# Altium PCB smoker_ctrl.PcbDoc
Units mm, origin at the board's own origin, x right, y up, seen from the top; angles counter-clockwise.
Board outline 125 x 60 mm, 2 copper layers (Top Layer, Bottom Layer); 88 components, 48 nets, 257 pads, 508 vias.
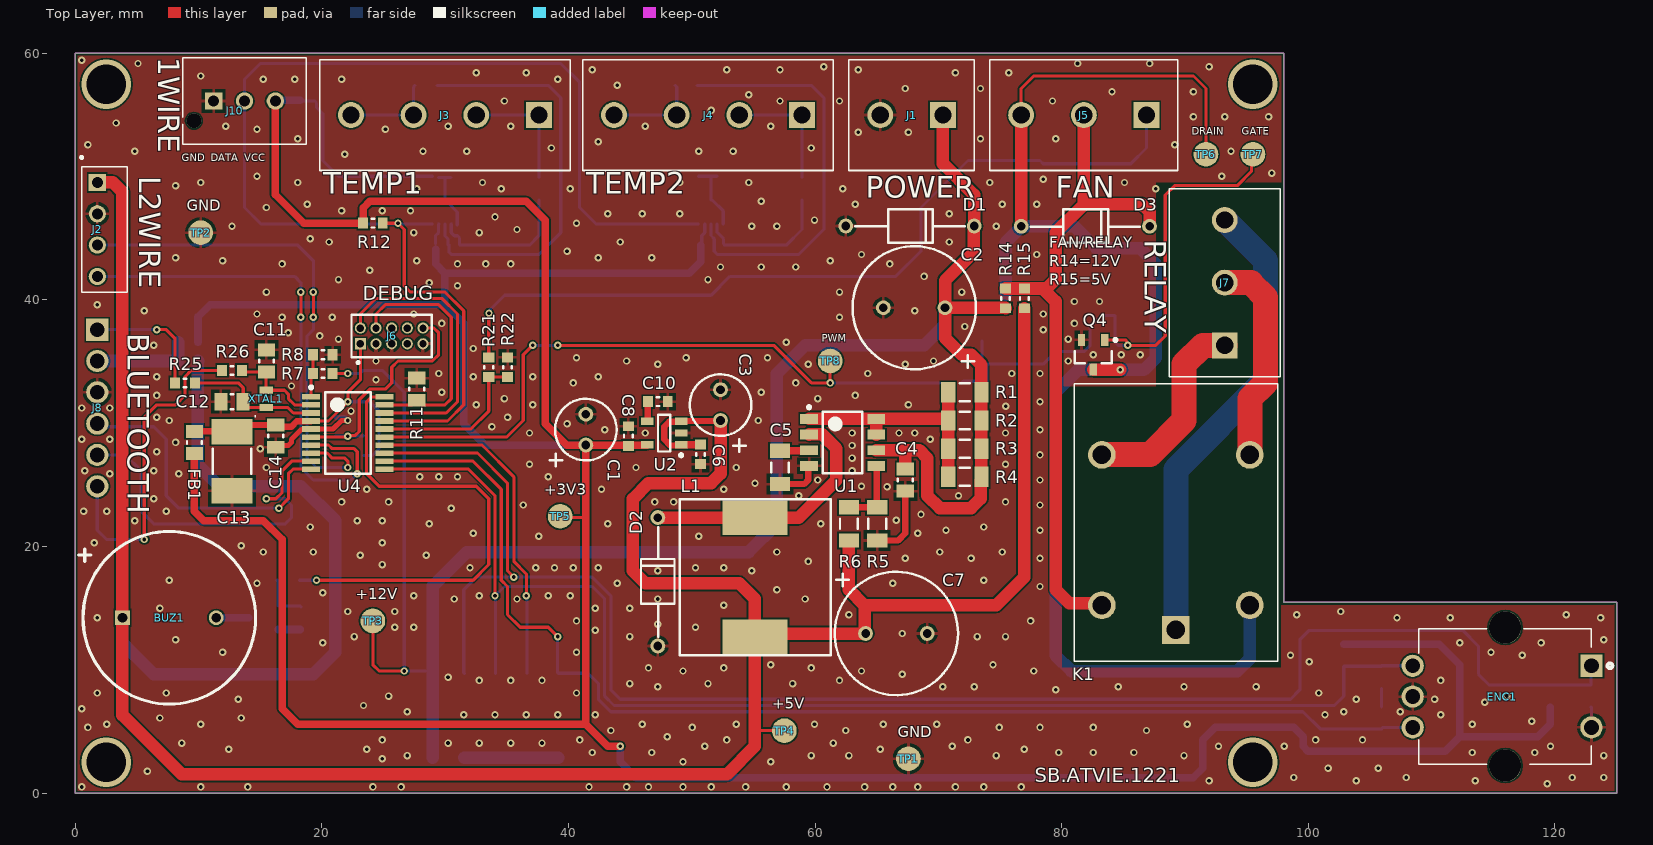
[diagram p0: Top Layer view]
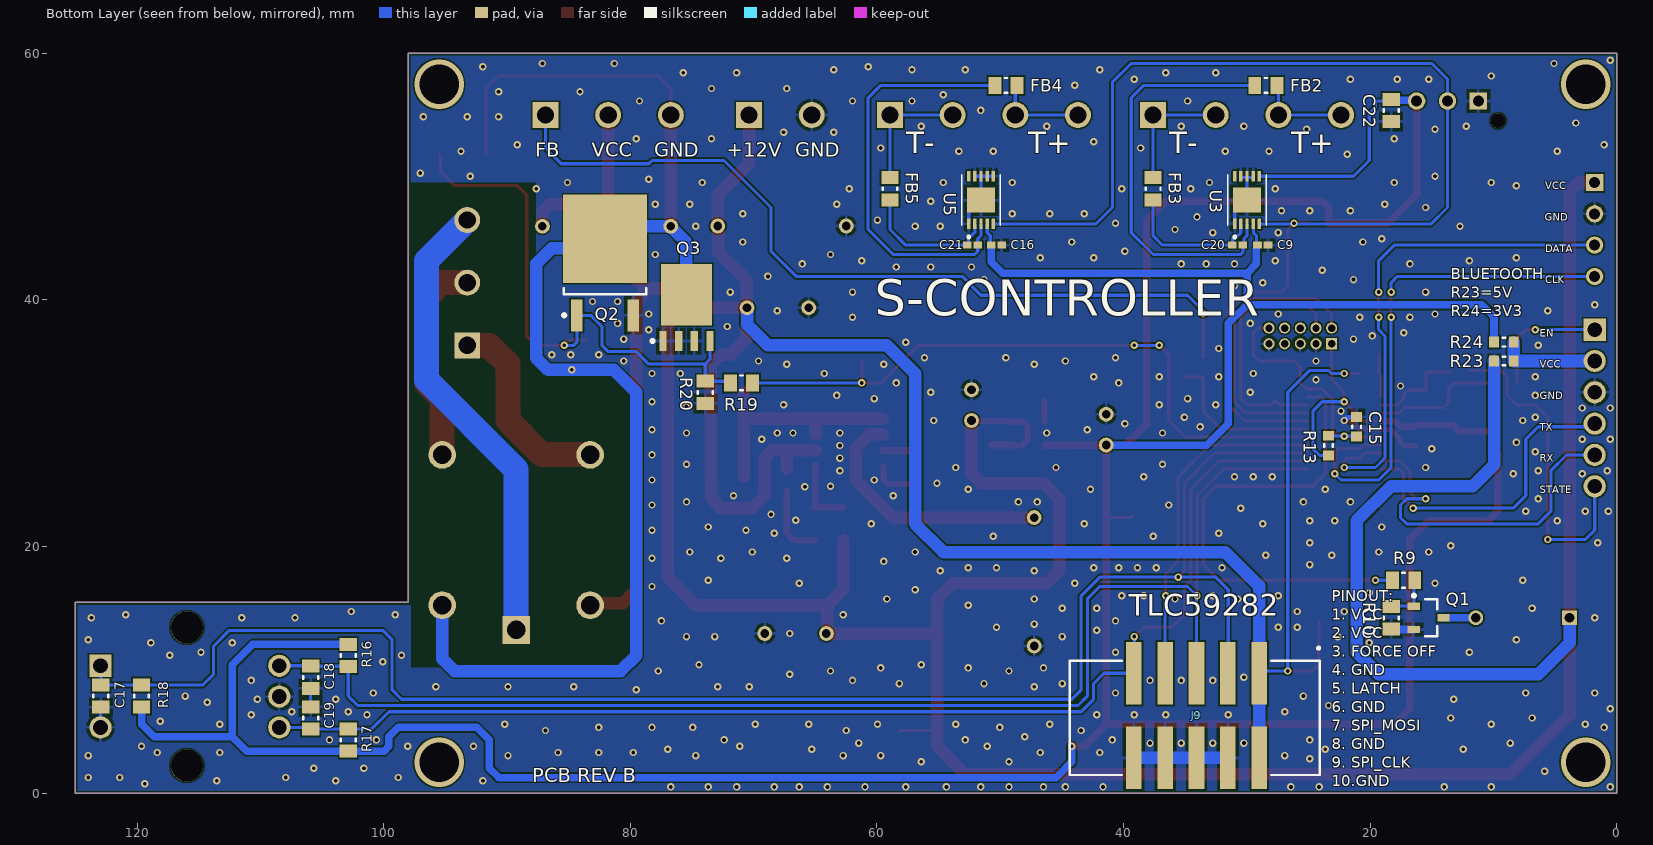
[diagram p1: Bottom Layer view, seen from below]

## Layer stack, top to bottom
Top Solder: solder mask 0.0102, Solder Resist, Dk 3.5
Top Layer: signal copper 0.0356
Dielectric 1: dielectric 0.32, FR-4, Dk 4.8
Bottom Layer: signal copper 0.0356
Bottom Solder: solder mask 0.0102, Solder Resist, Dk 3.5

## Board outline
0,0 125,0 125,15.5 98,15.5 98,60 0,60

## Design rules (kind name [scope] priority, off if disabled: settings)
Clearance [All] p1: gap=0.127 ignorepadtopadclearanceinfootprint=FALSE except(0: Arc-Hole Track-Hole SMDPad-Hole THPad-Hole Via-Hole Fill-Hole Poly-Hole Region-Hole Text-Hole)
HoleSize [All] p1: absolutevalues=TRUE maxlimit=6.3 minlimit=0.3 maxpercent=80.000 minpercent=20.000
MinimumSolderMaskSliver [All] p1: minsoldermaskwidth=0.001
PolygonConnect [All] p1: connectstyle=Relief reliefconductorwidth=0.254 reliefentries=4 polygonreliefangle="90 Angle" airgapwidth=0.254
RoutingVias [All] p1: holewidth=0.3 width=0.4 viastyle="Through Hole" minholewidth=0.3 minwidth=0.4 maxholewidth=6.3 maxwidth=7
SilkToSilkClearance [All] p1: silktosilkclearance=0.127
SilkToSolderMaskClearance [IsPad] p1: minsilkscreentomaskgap=0 clearancetoexposedcopper=TRUE
SolderMaskExpansion [All] p1: expansion=0.102 istentingtop=FALSE
Width [All] p1: maxlimit=20.32 minlimit=0.203 preferedwidth=0.254 minimp=50.000000 maximp=50.000000 favimp=50.000000
26 further rules are at their usual default settings.

## Components (designator, comment, footprint, x,y, rotation, side; value= is the part's Value field where it differs from the comment)
BUZ1 "CPM 121" "THT SND BUZ 14MM" 7.62,14.224 r0 top
C1 "22uF/35V" "THT CAP RAD D5.0mm P2.5mm" 41.402,28.234 r90 top
C2 "100uF/35V" "THT CAP RAD D10.0mm P5.0mm" 70.532,39.37 r180 top
C3 "22uF/35V" "THT CAP RAD D5.0mm P2.5mm" 52.324,30.226 r90 top
C4 "100nF/50V" "SMD 0805 GENERIC" 67.31,25.4 r90 top
C5 "470pF/50V" "SMD 1206 GENERIC" 57.15,26.416 r90 top
C6 "100nF" "SMD 0603 GENERIC" 50.696,27.484 r90 top
C7 "100uF/35V" "THT CAP RAD D10.0mm P5.0mm" 64.088,12.954 r0 top
C8 "100nF" "SMD 0603 GENERIC" 44.844,28.964 r270 top
C9 "100nF/16V" "SMD 0402 GENERIC" 28.702,44.45 r0 bottom
C10 "10nF" "SMD 0603 GENERIC" 47.244,31.75 r180 top
C11 "22pF/50V" "SMD 0805 GENERIC" 15.494,35.052 r270 top
C12 "22pF/50V" "SMD 0805 GENERIC" 12.7,31.75 r0 top
C13 "4,7uF/25V" "SMD 2312 POLARIZED" 12.7,26.924 r270 top
C14 "100nF/50V" "SMD 0805 GENERIC" 16.256,28.956 r270 top
C15 "100nF/16V" "SMD 0603 GENERIC" 21.082,29.718 r270 bottom
C16 "100nF/16V" "SMD 0402 GENERIC" 50.292,44.45 r0 bottom
C17 "100nF/50V" "SMD 0805 GENERIC" 122.936,7.874 r90 bottom
C18 "100nF/50V" "SMD 0805 GENERIC" 105.918,9.398 r90 bottom
C19 "100nF/50V" "SMD 0805 GENERIC" 105.918,6.096 r270 bottom
C20 "10nF/50V" "SMD 0402 GENERIC" 30.734,44.45 r0 bottom
C21 "10nF/50V" "SMD 0402 GENERIC" 52.241,44.45 r0 bottom
C22 "100nF/50V" "SMD 0805 GENERIC" 18.288,55.372 r270 bottom
D1 "1N4007" "THT DO-41" 62.484,46 r0 top
D2 "1N5819" "THT DO-41" 47.244,11.938 r90 top
D3 "1N4007" "THT DO-41" 76.708,45.974 r0 top
ENC1 "PEC12R-3222F-S0024" "THT REN PEC12R-3222F-S0024" 116.39,7.885 r0 top
FB1 "11R 100 MHz 1.5A" "SMD 0805 GENERIC" 9.652,28.448 r270 top
FB2 "11R 100 MHz 1.5A" "SMD 0805 GENERIC" 28.448,57.404 r0 bottom
FB3 "11R 100 MHz 1.5A" "SMD 0805 GENERIC" 37.592,49.022 r270 bottom
FB4 "11R 100 MHz 1.5A" "SMD 0805 GENERIC" 49.53,57.404 r0 bottom
FB5 "11R 100 MHz 1.5A" "SMD 0805 GENERIC" 58.928,49.022 r270 bottom
J1 "282841-2" "THT CON 2-PIN 5.08" 67.818,55 r180 top
J2 "LCD2WIRE" "THT CON 4-PIN 2.54 WHITE" 1.778,45.72 r270 top
J3 "282841-4" "THT CON 4-PIN 5.08" 29.972,55 r180 top
J4 "282841-4" "THT CON 4-PIN 5.08" 51.308,55 r180 top
J5 "282841-3" "THT CON 3-PIN 5.08" 81.788,55 r180 top
J6 "CON THT CORTEX DBG 10-PIN 2-ROW 1.27" "THT HEADER 2x5 1.27" 25.654,37.084 r0 top
J7 "282841-3" "THT CON 3-PIN 5.08" 93.218,41.402 r90 top
J8 "CON THT UNI 6-PIN 2.54" "THT CON UNI 6-PIN 2.54" 1.778,37.592 r270 top
J9 "CON SMD 10-PIN 2-ROW 2.54 WIDE" "SMD HEADER 2x5 2.54 WIDE" 36.615,6.301 r0 bottom
J10 "CON THT TE 1744418-3 3-PIN 2.5" "THT CON TE 1744418-3 2.5" 13.716,56.134 r0 top
K1 "REL 5V 10A 250VAC G5LE" "THT RELAY G5LE" 89.25,13.24 r90 top
L1 "220uH" "SMD IND SRR1210" 55.118,17.526 r270 top
Q1 "BC817" SOT23-3 15.24,14.224 r180 bottom
Q2 "IRLR2905" "SMD D-PAK (TO252AA)" 82.042,43.008 r90 bottom
Q3 "SQJA66EP" "SMD PowerPAK SO-8L" 75.438,39.37 r90 bottom
Q4 "BC817" SOT23-3 82.55,35.56 r270 top
R1 "1R" "SMD 1206 GENERIC" 72.136,32.512 r180 top
R2 "1R" "SMD 1206 GENERIC" 72.136,30.226 r180 top
R3 "1R" "SMD 1206 GENERIC" 72.136,27.94 r180 top
R4 "1R" "SMD 1206 GENERIC" 72.136,25.654 r180 top
R5 "1K2" "SMD 1206 GENERIC" 65.024,21.844 r90 top
R6 "3K6" "SMD 1206 GENERIC" 62.738,21.844 r90 top
R7 "5K" "SMD 0603 GENERIC" 20.066,34.036 r0 top
R8 "1K" "SMD 0603 GENERIC" 20.066,35.56 r180 top
R9 "2K2" "SMD 0805 GENERIC" 17.272,17.272 r180 bottom
R10 "10K" "SMD 0805 GENERIC" 18.288,14.224 r90 bottom
R11 "10K" "SMD 0805 GENERIC" 27.686,32.766 r90 top
R12 "4K7" "SMD 0603 GENERIC" 24.13,46.228 r0 top
R13 "10K" "SMD 0603 GENERIC" 23.368,28.194 r90 bottom
R14 "0R" "SMD 0603 GENERIC" 75.438,40.132 r270 top
R15 "0R" "SMD 0603 GENERIC" 76.962,40.132 r270 top
R16 "2K2" "SMD 0805 GENERIC" 102.87,11.176 r90 bottom
R17 "2K2" "SMD 0805 GENERIC" 102.87,4.318 r270 bottom
R18 "2K2" "SMD 0805 GENERIC" 119.634,7.874 r270 bottom
R19 "2K2" "SMD 0805 GENERIC" 70.982,33.274 r0 bottom
R20 "10K" "SMD 0805 GENERIC" 73.914,32.512 r90 bottom
R21 "5K" "SMD 0603 GENERIC" 33.528,34.544 r90 top
R22 "1K" "SMD 0603 GENERIC" 35.052,34.544 r270 top
R23 "0R" "SMD 0603 GENERIC" 9.144,35.052 r0 bottom
R24 "0R" "SMD 0603 GENERIC" 9.144,36.576 r0 bottom
R25 "0R" "SMD 0603 GENERIC" 8.89,33.274 r180 top
R26 "0R" "SMD 0603 GENERIC" 12.7,34.29 r180 top
TP1 "TPT SMD 200" "SMD TP 2.0mm" 67.564,2.794 r0 top
TP2 "TPT SMD 200" "SMD TP 2.0mm" 10.16,45.466 r0 top
TP3 "TPT SMD 200" "SMD TP 2.0mm" 24.13,13.97 r0 top
TP4 "TPT SMD 200" "SMD TP 2.0mm" 57.504,5.07 r0 top
TP5 "TPT SMD 200" "SMD TP 2.0mm" 39.314,22.457 r0 top
TP6 "TPT SMD 200" "SMD TP 2.0mm" 91.694,51.816 r0 top
TP7 "TPT SMD 200" "SMD TP 2.0mm" 95.504,51.816 r0 top
TP8 "TPT SMD 200" "SMD TP 2.0mm" 61.214,35.052 r0 top
U1 "PWR MC34063ADR" SOIC-8 62.23,28.448 r0 top
U2 "TPS79333DBVR" SOT23-5 47.752,29.21 r180 top
U3 "SNS TMP IF MAX31850KATB+T" TDFN-10 29.972,48.103 r90 bottom
U4 "MCU STM32G030F6P6" TSOP-20 22.098,29.21 r0 top
U5 "SNS TMP IF MAX31850KATB+T" TDFN-10 51.546,48.103 r90 bottom
XTAL1 "32.768 KHz" "SMD-2 XTAL 2.0mmx1.2mm" 15.494,32.004 r90 top

## Footprints (in the part's own frame and the unit in brackets; to place one, negate y for a bottom-side part, rotate by r counter-clockwise, add the part's x,y. Pads: shape width x height; smd on the part's side, far side on the other; paste and mask are expansions set on the pad)
"SMD 0402 GENERIC" [mm]
  rect 0.7x0.55 smd: 1(-0.425,0) 2(0.425,0)
  body extent -0.55,-0.27 0.55,0.28, height 0.35
"SMD 0603 GENERIC" [mm]
  rect 0.8x0.9 smd: 1(-0.8,0) 2(0.8,0)
  silkscreen extent -0.1,-0.35 0.1,0.35, body extent -0.85,-0.45 0.85,0.45, height 0.55
"SMD 0805 GENERIC" [mm]
  rect 1.05x1.4 smd: 1(-0.9,0) 2(0.9,0)
  silkscreen extent -0.1,-0.6 0.1,0.6, body extent -1.05,-0.7 1.05,0.7, height 0.6
"SMD 1206 GENERIC" [mm]
  rect 1.15x1.65 smd: 1(-1.35,0) 2(1.35,0)
  silkscreen extent -0.4,-0.72 0.4,0.72, body extent -1.58,-0.82 1.58,0.82, height 0.65
"SMD 2312 POLARIZED" [mm] "BAUFORM C"
  rect 2.05x3.35 smd: 1(-2.4,0) 2(2.4,0)
  silkscreen extent -3.69,-1.58 1,1.94, body extent -3.05,-1.65 3.05,1.65, height 2.6
"SMD D-PAK (TO252AA)" [mm] "D-PAK, 3-Pads, Body 6.21x6.73mm (max), IPC Medium Density"
  rect 2.6x0.95 smd: 1(-4.25,2.29) 3(-4.25,-2.29)
  rect 7.2x6.8 smd: 4(1.95,0)
  silkscreen extent -4.37,-3.35 -2.05,3.44, body extent -2.55,-3.37 3.67,3.37, height 2.39
"SMD HEADER 2x5 2.54 WIDE" [mil]
  rect 50x200 smd: 1(-300,-135) 2(-300,135) 3(-200,-135) 4(-200,135) 5(-100,-135) 6(-100,135) 7(0,-135) 8(0,135) 9(100,-135) 10(100,135)
  silkscreen extent -494,-219 305,190, body extent -500,-220 300,220, height 450
"SMD IND SRR1210" [mm]
  rect 2.8x5.3 smd: 1(-4.826,0) 2(4.826,0)
  silkscreen extent -6.32,-6.1 6.35,6.15, body extent -6,-6 6,6, height 10
"SMD PowerPAK SO-8L" [mm]
  rect 1.65x0.6 smd: 1(-2.7,-0.635) 1(-2.7,0.635) 1(-2.7,1.905) 4(-2.7,-1.905)
  rect 5x4.15 smd: 5(1.05,0)
  silkscreen extent -2.82,2.63 -2.58,2.88, body extent -1.9,-2.5 2.57,2.5, height 1.14
"SMD TP 2.0mm" [mm]
  round 2 smd: 1(0,0)
"SMD-2 XTAL 2.0mmx1.2mm" [mm]
  rect 0.6x1.1 smd: 1(-0.725,0.025) 2(0.675,0.025)
  body extent -1.03,-0.57 0.97,0.63, height 0.6
SOIC-8 [mm] "SOIC, 8-Leads, Body 4.90x3.90mm, Pitch 1.27mm, IPC Medium Density"
  rect 1.45x0.8 smd: 1(-2.725,1.905) 2(-2.725,0.635) 3(-2.725,-0.635) 4(-2.725,-1.905) 5(2.725,-1.905) 6(2.725,-0.635) 7(2.725,0.635) 8(2.725,1.905)
  silkscreen extent -2.85,-2.5 1.6,2.98, body extent -2,-2.5 2,2.5, height 1.75
SOT23-3 [mm]
  rect 1x0.6 smd: 1(-1.2,0.95) 2(-1.2,-0.95) 3(1.2,0)
  silkscreen extent -1.33,-1.5 0.7,1.92, body extent -1.15,-1.45 1.15,1.45, height 1.1
SOT23-5 [mm]
  rect 1x0.6 smd: 1(-1.375,0.95) 2(-1.375,0) 3(-1.375,-0.95) 4(1.375,-0.95) 5(1.375,0.95)
  silkscreen extent -1.5,-1.5 0.5,1.92, body extent -0.88,-1.5 0.87,1.5, height 1.45
TDFN-10 [mm]
  rrect25% 0.86x0.27 smd: 1(-1.935,1) 2(-1.935,0.5) 3(-1.935,0) 4(-1.935,-0.5) 5(-1.935,-1) 6(1.935,-1) 7(1.935,-0.5) 8(1.935,0) 9(1.935,0.5) 10(1.935,1)
  rect 2x2.3 smd paste-2: 11(0,0)
  silkscreen extent -3.09,-1.55 2.05,1.55, body extent -2,-1.5 2,1.5, height 0.8
"THT CAP RAD D5.0mm P2.5mm" [mm]
  round 1.2 hole 0.7: 1(0,0) 2(2.5,0)
  silkscreen extent -1.73,-2.5 3.75,2.95, body extent -1.27,-2.5 3.73,2.5, height 11
"THT CAP RAD D10.0mm P5.0mm" [mm]
  round 1.2 hole 0.7: 1(0,0) 2(5,0)
  silkscreen extent -2.5,-5 7.5,5, body extent -2.49,-5 7.51,5, height 12.5
"THT CON 2-PIN 5.08" [mm]
  rect 2.1x2.1 hole 1.4: 1(-2.54,0)
  round 2.1 hole 1.4: 2(2.54,0)
  silkscreen extent -5.08,-4.5 5.08,4.5, body extent -5.08,-4.43 5.58,4.57, height 15.2
"THT CON 3-PIN 5.08" [mm]
  rect 2.1x2.1 hole 1.4: 1(-5.08,0)
  round 2.1 hole 1.4: 2(0,0) 3(5.08,0)
  silkscreen extent -7.62,-4.5 7.62,4.5, body extent -7.62,-4.44 8.12,4.56, height 15.2
"THT CON 4-PIN 2.54 WHITE" [mm]
  rect 1.398x1.398 hole 0.89: 1(-3.81,0)
  round 1.398 hole 0.89: 2(-1.27,0) 3(1.27,0) 4(3.81,0)
  silkscreen extent -5.94,-1.37 5.08,2.42, body extent -5.08,-1.25 5.08,2.4, height 9.5
"THT CON 4-PIN 5.08" [mm]
  rect 2.1x2.1 hole 1.4: 1(-7.62,0)
  round 2.1 hole 1.4: 2(-2.54,0) 3(2.54,0) 4(7.62,0)
  silkscreen extent -10.16,-4.5 10.16,4.5, body extent -10.16,-4.43 10.66,4.57, height 15.2
"THT CON TE 1744418-3 2.5" [mm]
  rect 1.408x1.408 hole 0.9: 1(-2.5,0)
  round 1.408 hole 0.9: 2(0,0) 3(2.5,0)
  round 1.2 hole 1.2 unplated: ""(-4.1,-1.6)
  silkscreen extent -5,-3.5 5,3.5, body extent -5,-3.3 5,3.23, height 8.8
"THT CON UNI 6-PIN 2.54" [mm]
  rect 1.8x1.8 hole 1.2: 1(0,0)
  round 1.8 hole 1.2: 2(2.54,0) 3(5.08,0) 4(7.62,0) 5(10.16,0) 6(12.7,0)
"THT DO-41" [mm]
  round 1.2 hole 0.7: A(0,0) K(10.414,0)
  silkscreen extent 0.76,-1.35 9.63,1.37, body extent -0.38,-0.98 10.79,1.02, height 2.5
"THT HEADER 2x5 1.27" [mm]
  rect 0.9x0.9 hole 0.6: 1(-2.54,-0.635)
  round 0.9 hole 0.6: 2(-2.54,0.635) 3(-1.27,-0.635) 4(-1.27,0.635) 5(0,-0.635) 6(0,0.635) 7(1.27,-0.635) 8(1.27,0.635) 9(2.54,-0.635) 10(2.54,0.635)
  silkscreen extent -3.26,-2.26 3.26,1.72
"THT RELAY G5LE" [mm]
  rect 2.25x2.25 hole 1.5: 1(0,0)
  round 2.25 hole 1.5: 2(2,-6) 3(14.2,-6) 4(14.2,6) 5(2,6)
  silkscreen extent -2.55,-8.25 19.95,8.25, body extent -2.55,-8.25 19.95,8.25, height 19
"THT REN PEC12R-3222F-S0024" [mm]
  rect 1.8x1.8 hole 1.2: 1(6.568,2.449)
  round 1.8 hole 1.2: 2(6.568,-2.551) A(-7.932,2.449) B(-7.932,-2.551) C(-7.932,-0.051)
  round 2.6 hole 2.6 unplated: ""(-0.432,-5.651) ""(-0.432,5.549)
  silkscreen extent -7.43,-5.55 8.27,5.45, body extent -8.03,-7.05 6.72,6.95, height 20.25
"THT SND BUZ 14MM" [mm]
  rect 1.2x1.2 hole 0.8: 1(-3.8,0)
  round 1.2 hole 0.8: 2(3.8,0)
  silkscreen extent -7.37,-7 7,7, body extent -7,-7 7,7, height 7.93
TSOP-20 [mm] "TSOP, 20-Leads, Body 6.50x4.40mm, Pitch 0.65mm, IPC Medium Density"
  rect 1.45x0.45 smd: 1(-2.975,2.925) 2(-2.975,2.275) 3(-2.975,1.625) 4(-2.975,0.975) 5(-2.975,0.325) 6(-2.975,-0.325) 7(-2.975,-0.975) 8(-2.975,-1.625) 9(-2.975,-2.275) 10(-2.975,-2.925) 11(2.975,-2.925) 12(2.975,-2.275) 13(2.975,-1.625) 14(2.975,-0.975) 15(2.975,-0.325) 16(2.975,0.325) 17(2.975,0.975) 18(2.975,1.625) 19(2.975,2.275) 20(2.975,2.925)
  silkscreen extent -3.1,-3.3 1.85,3.82, body extent -2.25,-3.3 2.25,3.3, height 1.2

## Part data
BUZ1: library part "SND BUZ 3-15 VDC 14MM CPM 121"
C1 C3: library part "CAP THT ELC RAD 22uF 35V 20% D5.0mm P2.5mm"
C2 C7: library part "CAP THT ELC RAD 100uF 35V 20% D10.0mm P5.0mm"
C4 C14 C17 C18 C19 C22: library part "CAP SMD CER 100nF 50V 10% X7R 0805"
C5: library part "CAP SMD CER 470pF 50V 5% C0G 1206"
C6 C8 C15: library part "CAP SMD CER 100nF 16V 10% X7R 0603"
C9 C16: library part "CAP SMD CER 100nF 16V 10% X7R 0402"
C10: library part "CAP SMD CER 10nF 16V 10% X7R 0603"
C11 C12: library part "CAP SMD CER 22pF 50V 5% C0G 0805"
C13: library part "CAP SMD TAN 4,7uF 25V 10% 2312"
C20 C21: library part "CAP SMD CER 10nF 50V 10% X7R 0402"
D1 D3: library part "SEM GEN 1000V 1A DO-41 1N4007"
D2: library part "SEM SCH 40V 1A DO-41 1N5819"
ENC1: library part "REN 24PPR THT VER PEC12R-3222F-S0024"
FB1 FB2 FB3 FB4 FB5: library part "FBD SMD 11R 100MHz 1.5A 0805"
J1: library part "CON THT TERMINAL BLOCK  2-PIN 5.08"
J2: library part "CON THT LCD2WIRE 4-PIN 2.54"
J3 J4: library part "CON THT TERMINAL BLOCK  4-PIN 5.08"
J5 J7: library part "CON THT TERMINAL BLOCK  3-PIN 5.08"
J9: "HTST-105-01-SM-DV-P"
L1: library part "IND SMD 220uH 1.7A SRR1210"
Q1 Q4: library part "SEM BJT NPN 45V 500mA BC817"
Q2: library part "SEM FET NCH IRLR2905"
Q3: library part "SEM FET NCH SQJA66EP"
R1 R2 R3 R4: library part "RES SMD 1R 1% 1206"
R5: library part "RES SMD 1K2 1% 1206"
R6: library part "RES SMD 3K6 1% 1206"
R7 R21: library part "RES SMD 5K 1% 0603"
R8 R22: library part "RES SMD 1K 1% 0603"
R9 R16 R17 R18 R19: library part "RES SMD 2K2 1% 0805"
R10 R11 R20: library part "RES SMD 10K 1% 0805"
R12: library part "RES SMD 4K7 1% 0603"
R13: library part "RES SMD 10K 1% 0603"
R14 R15 R23 R24 R25 R26: library part "RES SMD 0R 0603"
U2: library part "PWR TPS79333DBVR"
XTAL1: library part "XTAL SMD 32.768 KHz 2.0mmx1.2mm"

## Via types
v1: diameter 0.6, hole 0.3, Top Layer to Bottom Layer, tented both sides, 502 vias
v2: diameter 4, hole 3.2, Top Layer to Bottom Layer, 4 vias
v3: diameter 0.6, hole 0.3, Top Layer to Bottom Layer, 2 vias

## Nets (pads, with @x,y where several pads share a name; then routed paths per layer and width w, separated by ;. In a path a pad name is that pad's centre, name@x,y a point inside that pad or via, vN(x,y) a via of type N, cw(c..) or ccw(c..) an arc to the next point about the centre after c; other vN are vias at no path point)
3V3: C1.1 C8.2 C9.2 C16.2 C22.1 FB1.2 J10.3 R12.1 R16.2 R17.2 R18.2 R24.2 TP5.1 U2.5 U3.4 U3.6 U5.4 | length 329.6
  Top Layer w0.254: TP5.1 39.418,22.352 41.148,22.352
  Top Layer w0.508: C8.2@44.704,28.156 44.747,28.199 C8.2@44.762,28.214 ; U2.5@46.331,28.214 U2.5
  Top Layer w0.61: FB1.2 9.652,22.86 10.414,22.098 15.24,22.098 16.764,20.574 16.764,6.858 18.034,5.588 41.402,5.588 ; J10.3 16.216,48.554 18.542,46.228 R12.1 23.33,47.46 23.876,48.006 36.576,48.006 38.1,46.482 38.1,29.972 39.838,28.234 C1.1 ; v1(44.196,3.81) 43.18,3.81 41.402,5.588 ; C8.2@44.762,28.214 U2.5@46.331,28.214 ; C8.2 44.81,28.199 44.747,28.199 41.437,28.199 C1.1 ; 41.402,5.588 C1.1
  Bottom Layer w0.254: C22.1@18.219,56.203 18.288,56.134 19.409,56.134 19.558,55.985 19.558,55.626 20.066,55.118 20.066,51.308 21.336,50.038 U3.6 ; C9.2@29.21,44.533 29.21,45.212 29.464,45.466 29.464,46.16 U3.4 ; C16.2@50.8,44.533 50.8,45.212 51.046,45.458 U5.4
  Bottom Layer w0.61: R24.2 9.944,38.646 10.922,39.624 29.972,39.624 ; J10.3 16.285,56.203 C22.1@18.219,56.203 ; 29.21,44.131 29.21,42.926 29.972,42.164 ; C1.1 33.234,28.234 31.496,29.972 31.496,38.1 29.972,39.624 ; v1(44.196,3.81) 44.196,2.54 45.466,1.27 90.678,1.27 91.44,2.032 91.44,4.318 92.456,5.334 98.806,5.334 99.568,4.572 99.568,3.81 99.96,3.418 R17.2 111.114,3.418 112.268,4.572 ; C16.2 50.717,43.097 49.784,42.164 29.972,42.164 ; R16.2 110.606,12.076 112.268,10.414 112.268,4.572 ; R18.2 119.634,5.588 118.618,4.572 112.268,4.572 ; 29.972,39.624 29.972,42.164
3V3_FILT: C13.1 C14.1 FB1.1 J6.1 R13.1 U4.4 | length 26.5
  Top Layer w0.254: U4.4 20.533,30.185 v1(22.098,31.75) 22.098,32.512 23.114,33.528 J6.1 J6.1@22.86,36.195
  Top Layer w0.508: FB1.1 12.676,29.348 C13.1 13.232,29.856 C14.1 16.394,29.718 17.526,29.718 17.964,30.156 19.094,30.156 U4.4
  Bottom Layer w0.254: v1(22.098,31.75) 23.876,31.75 24.638,30.988 24.638,27.94 24.092,27.394 R13.1
5V: BUZ1.1 C3.1 C6.2 C7.1 J2.1 L1.2 R6.1 R15.2 R23.2 TP4.1 U2.1 U2.3 | length 258.3
  Top Layer w0.254: 55.118,5.08 TP4.1@58.166,5.08
  Top Layer w0.508: U2.1@49.139,28.272 U2.1 49.081,28.214 48.701,28.214 48.681,28.194 48.26,28.194 47.752,28.702 47.752,29.718 48.148,30.114 49.081,30.114 U2.3 49.16,30.193 52.291,30.193 C3.1 ; C6.2@50.684,28.272 C6.2 ; C7.1@64.008,13.034 C7.1
  Top Layer w0.61: U2.1@49.139,28.272 C6.2@50.684,28.272
  Top Layer w1.016: J2.1@1.969,49.339 J2.1 3.048,49.53 3.82,48.758 BUZ1.1 3.82,6.34 8.636,1.524 52.832,1.524 55.118,3.81 55.118,5.08 L1.2 ; C3.1 52.324,25.908 51.562,25.146 46.482,25.146 45.212,23.876 45.212,18.034 46.228,17.018 53.848,17.018 55.118,15.748 L1.2 ; R6.1 62.738,16.51 64.008,15.24 ; C7.1@64.008,13.034 64.008,15.24 ; C7.1 64.053,12.919 55.337,12.919 L1.2 ; R15.2 76.962,17.526 74.676,15.24 64.008,15.24
  Bottom Layer w1.016: BUZ1.1 3.82,12.182 6.35,9.652 19.304,9.652 21.082,11.43 21.082,22.098 18.288,24.892 11.684,24.892 9.906,26.67 9.906,35.014 R23.2
12V: C2.1 C4.2 D1.K J1.1 J9.1 J9.2 R1.1 R2.1 R3.1 R4.1 R7.2 R14.2 TP3.1 U1.6 | length 164.5
  Top Layer w0.254: R7.2 v1(22.098,34.036) ; TP3.1 24.13,10.414 24.638,9.906 v1(26.67,9.906)
  Top Layer w1.016: U1.6 67.31,27.813 ; C4.2 67.31,27.813 ; J1.1 70.358,51.054 72.898,48.514 D1.K 72.863,45.965 72.863,43.907 70.532,41.576 C2.1 ; R14.2 75.4,39.37 C2.1 ; 67.31,27.813 68.453,27.813 69.088,27.178 69.088,24.13 70.104,23.114 72.644,23.114 73.419,23.889 73.419,25.337 73.482,25.4 73.486,25.4 R4.1 R3.1 R2.1 R1.1 73.486,34.718 72.644,35.56 71.882,35.56 70.532,36.91 C2.1
  Bottom Layer w0.254: v1(22.098,34.036) 23.114,34.036 23.368,34.29 24.892,34.29 26.67,32.512 v1(26.67,9.906) 28.819,9.906 J9.1
  Bottom Layer w1.016: J9.2 J9.1 28.995,16.803 31.75,19.558 54.61,19.558 56.896,21.844 56.896,34.036 59.182,36.322 68.834,36.322 70.497,37.985 70.497,39.335 C2.1
BUZZER: R9.1 U4.20 | length 39.4
  Top Layer w0.254: v1(19.558,17.272) 32.258,17.272 33.528,18.542 33.528,23.876 32.512,24.892 24.638,24.892 23.622,25.908 23.622,31.75 24.007,32.135 U4.20
  Bottom Layer w0.254: R9.1 v1(19.558,17.272)
ENC_A: C18.2 ENC1.A J9.5 R16.1 U4.11 | length 110.4
  Top Layer w0.254: U4.11 31.881,26.285 34.036,24.13 v1(34.036,16.002)
  Bottom Layer w0.254: J9.5 34.075,15.963 v1(34.036,16.002) 34.798,16.764 41.91,16.764 42.926,15.748 42.926,7.874 43.688,7.112 102.108,7.112 102.87,7.874 R16.1 102.892,10.298 C18.2 105.954,10.334 ENC1.A
ENC_B: C19.2 ENC1.B J9.9 R17.1 U4.12 | length 100.6
  Top Layer w0.254: U4.12 32.247,26.935 34.544,24.638 34.544,17.272 35.052,16.764 35.052,14.478 36.068,13.462 38.354,13.462 v1(39.116,12.7)
  Bottom Layer w0.254: v1(39.116,12.7) 39.116,9.769 J9.9 41.578,9.73 42.418,8.89 42.418,7.62 43.434,6.604 99.568,6.604 100.954,5.218 R17.1 105.896,5.218 C19.2 106.056,5.334 ENC1.B
ENC_SW: C17.2 ENC1.1 J9.3 R18.1 U4.13 | length 135.5
  Top Layer w0.254: U4.13 32.613,27.585 35.052,25.146 35.052,18.034 v1(35.56,17.526)
  Bottom Layer w0.254: J9.3 31.496,9.769 31.496,16.51 32.512,17.526 v1(35.56,17.526) 41.91,17.526 43.434,16.002 43.434,8.382 44.196,7.62 98.552,7.62 99.314,8.382 99.314,12.446 100.076,13.208 112.522,13.208 113.792,11.938 113.792,9.652 114.67,8.774 R18.1 C17.2 122.936,10.312 ENC1.1
FAN_FB: R21.1 R22.2 U4.16 | length 13.3
  Top Layer w0.254: U4.16 32.075,29.535 33.528,30.988 R21.1 R22.2
GND: C1.2 C2.2 C3.2 C4.1 C5.1 C6.1 C7.2 C8.1 C9.1 C10.1 C11.1 C12.1 C13.2 C14.2 C15.1 C16.1 C17.1 C18.1 C19.1 C22.2 D1.A D2.A ENC1.2 ENC1.C J1.2 J2.2 J6.3 J6.5 J6.9 J8.3 J9.4 J9.6 J9.8 J9.10 J10.1 Q1.2 Q2.3 Q3.1 Q4.2 R5.1 R8.1 R10.1 R11.2 R20.1 R22.1 TP1.1 TP2.1 U1.4 U2.2 U3.1 U3.7 U3.8 U3.9 U3.11 U4.5 U5.1 U5.6 U5.7 U5.8 U5.9 U5.11 | length 41.4
  Top Layer w0.4: C14.2 16.394,28.194 17.272,28.194 17.526,28.448 17.526,28.702 18.334,29.51 19.098,29.51 U4.5 20.899,29.535 21.59,30.226 v1(22.098,30.226)
  Top Layer w0.508: C5.1 59.102,25.066 59.436,25.4 59.436,26.474 U1.4 ; R5.1 66.722,20.494 67.31,21.082 C4.1
  Bottom Layer w0.254: R10.1@18.238,13.274 R10.1 ; U3.7@29.472,49.941 U3.8@29.972,49.941 ; U3.9@30.472,49.941 U3.8@29.972,49.941 ; U3.1@30.972,46.071 30.972,47.133 30.099,48.006 29.972,48.006 U3.8@29.972,49.941 ; U5.6 U5.7 U5.8 ; U5.9 U5.8 ; U5.1 52.546,47.23 51.673,48.103 U5.11 U5.8 ; C19.1 C18.1 ; C17.1 122.958,6.952 ENC1.2
  Bottom Layer w0.4: C15.1 21.12,30.48 21.844,30.48 v1(22.098,30.226)
  Bottom Layer w0.61: Q1.2 R10.1@18.238,13.274
  Bottom Layer w1.016: J9.4 J9.6 J9.8 J9.10
  other v1: 0.508,0.508 10.16,0.508 13.97,0.508 24.13,0.508 26.416,0.508 41.656,0.508 44.704,0.508 46.482,0.508 49.276,0.508 51.562,0.508 54.356,0.508 57.658,0.508 60.96,0.508 64.008,0.508 66.294,0.508 68.326,0.508 71.374,0.508 73.66,0.508 76.708,0.508 119.38,0.762 91.948,1.016 103.886,1.016 113.538,1.016 98.806,1.27 107.95,1.27 121.412,1.27 123.952,1.27 5.842,1.778 101.6,2.032 105.664,2.032 49.276,2.54 56.388,2.54 24.892,2.794 26.924,3.048 59.69,3.048 62.738,3.048 74.676,3.048 89.916,3.048 123.952,3.048 41.91,3.302 46.736,3.302 79.756,3.302 82.55,3.302 85.852,3.302 113.284,3.302 118.364,3.302 12.446,3.556 23.622,3.556 65.278,3.556 76.962,3.556 51.054,3.81 71.12,3.81 92.71,3.81 98.044,3.81 119.634,3.81 8.636,4.064 30.226,4.064 32.766,4.064 35.306,4.064 37.846,4.064 61.468,4.064 24.892,4.318 40.894,4.318 52.832,4.318 72.39,4.318 100.584,4.318 104.394,4.318 48.006,4.572 43.434,5.08 62.484,5.08 86.868,5.08 1.016,5.334 50.038,5.334 74.93,5.334 78.232,5.334 82.55,5.334 2.54,5.588 10.16,5.588 45.974,5.588 53.594,5.588 59.944,5.588 65.532,5.588 69.85,5.588 90.17,5.588 113.284,5.588 118.11,5.842 6.858,6.096 13.462,6.096 31.496,6.35 34.036,6.35 36.576,6.35 39.116,6.35 42.164,6.35 101.346,6.35 110.744,6.35 26.924,6.604 102.87,6.604 107.442,6.604 0.508,6.858 23.368,7.112 114.3,7.366 13.208,7.62 103.886,7.62 110.236,7.62 25.4,7.874 116.078,7.874 1.778,8.128 7.366,8.128 40.64,8.128 100.838,8.128 79.502,8.382 47.244,8.636 70.358,8.636 72.898,8.636 84.582,8.636 89.916,8.636 95.758,8.636 44.958,8.89 51.308,8.89 58.166,8.89 32.766,9.144 35.306,9.144 37.846,9.144 61.976,9.144 110.744,9.144 30.226,9.398 67.056,9.652 49.276,9.906 63.754,9.906 77.724,9.906 46.482,10.16 52.578,10.16 59.69,10.16 56.388,10.414 74.422,10.414 100.076,10.668 98.552,11.176 117.348,11.176 11.938,11.43 40.64,11.43 114.808,11.43 20.066,12.192 112.268,12.192 118.872,12.192 8.128,12.446 123.952,12.446 22.606,12.7 44.958,12.7 73.152,12.7 75.438,12.7 67.056,12.954 42.164,13.208 25.908,13.462 27.432,13.462 50.292,13.462 47.244,13.716 40.64,13.97 77.47,13.97 1.778,14.224 107.188,14.224 111.506,14.224 123.698,14.224 62.738,14.478 99.06,14.478 120.904,14.478 22.098,14.732 25.908,14.732 102.616,14.732 6.858,14.986 42.164,14.986 44.958,14.986 52.578,15.24 30.734,15.748 35.814,15.748 47.244,15.748 59.182,15.748 27.432,16.002 32.766,16.002 38.354,16.002 40.132,16.002 20.066,16.256 56.896,16.51 78.232,16.764 14.732,17.018 43.942,17.018 66.294,17.018 7.62,17.272 73.66,17.272 47.244,18.034 54.864,18.034 32.004,18.288 37.338,18.288 38.862,18.288 40.386,18.288 42.418,18.288 50.292,18.288 52.578,18.288 24.892,18.542 59.436,18.796 67.31,19.05 72.644,19.05 78.232,19.05 23.114,19.304 28.448,19.304 15.24,19.558 19.304,19.558 56.896,19.558 70.104,19.558 75.184,19.558 13.462,20.066 1.524,20.32 24.892,20.32 37.592,20.828 50.546,20.828 32.258,21.082 68.326,21.082 70.612,21.336 78.232,21.336 19.05,21.59 73.66,21.59 28.702,21.844 43.18,21.844 60.452,21.844 4.826,22.098 22.86,22.098 24.892,22.098 66.565,22.144 68.58,22.606 0.664,22.866 2.54,22.86 7.366,22.86 30.48,23.114 36.322,23.368 78.232,23.368 21.59,23.622 25.4,23.622 46.99,23.622 48.514,23.622 75.438,23.622 6.35,23.876 58.674,24.13 71.628,24.13 23.622,24.638 42.672,24.638 52.578,24.638 65.833,24.845 63.754,24.892 55.118,25.146 60.198,25.4 78.232,25.4 27.94,25.654 29.464,25.654 30.988,25.654 38.354,25.654 2.794,25.908 8.382,25.908 0.762,26.162 6.35,26.162 62.992,26.162 15.494,26.416 45.466,26.416 53.594,26.416 36.83,26.67 75.438,26.67 62.992,27.178 78.232,27.432 6.604,27.686 14.986,27.94 62.992,28.194 8.128,28.448 0.508,28.702 2.794,28.702 69.342,28.702 36.83,29.21 46.228,29.21 62.992,29.21 66.802,29.21 68.072,29.21 75.438,29.21 42.926,29.464 78.232,29.464 33.782,29.718 39.878,29.972 7.62,30.226 55.372,30.226 6.604,30.48 35.052,30.48 22.352,30.988 0.508,31.242 2.794,31.242 75.45,31.392 32.512,31.496 37.084,31.496 67.564,31.496 78.232,31.75 34.798,32.004 60.198,32.004 6.604,32.258 63.246,32.258 29.718,32.512 55.626,32.512 17.526,33.02 40.386,33.274 58.42,33.274 24.384,33.528 6.604,33.782 32.258,33.782 37.084,33.782 42.418,33.782 29.464,34.036 64.262,34.036 75.946,34.036 78.232,34.036 47.244,34.798 59.436,34.798 67.31,34.798 24.384,35.052 44.704,35.052 69.596,35.052 80.518,35.052 40.64,35.306 49.53,35.306 56.134,35.306 82.55,35.56 84.836,35.56 86.36,35.56 32.258,36.068 6.35,36.322 57.658,36.576 21.336,36.83 80.518,36.83 19.812,37.084 17.272,37.338 78.486,37.592 72.136,37.846 29.718,38.1 81.026,38.1 16.764,38.608 20.828,38.608 61.976,38.608 14.732,38.862 27.432,38.862 78.486,38.862 5.588,39.116 68.072,39.116 1.778,39.624 81.026,39.878 83.058,39.878 15.494,40.64 61.976,40.64 71.882,40.64 30.988,41.148 28.702,41.402 21.336,41.656 51.308,41.656 68.834,41.91 23.876,42.418 52.324,42.672 55.626,42.672 58.42,42.672 16.764,42.926 30.988,42.926 33.274,42.926 35.306,42.926 66.04,42.926 11.938,43.18 27.686,43.18 61.214,43.18 8.128,43.434 42.418,43.434 46.736,43.434 63.754,43.688 77.978,43.688 39.878,43.942 20.574,44.704 44.196,44.704 70.866,44.704 19.05,44.958 27.432,45.466 32.766,45.466 35.814,45.72 12.7,45.974 54.864,45.974 56.896,45.974 74.676,45.974 40.64,46.228 59.944,46.482 34.036,46.736 43.18,46.99 45.974,46.99 49.022,46.99 70.866,46.99 21.59,47.244 24.892,47.244 27.178,47.244 15.494,47.498 18.796,47.752 63.246,47.752 75.184,47.752 77.978,47.752 55.626,48.006 27.686,49.022 34.544,49.022 40.132,49.022 62.23,49.022 87.63,49.022 8.128,49.276 10.16,49.53 18.034,49.53 33.02,49.53 49.022,49.53 54.61,49.53 74.168,49.53 85.09,49.53 78.486,49.784 14.732,50.038 92.964,50.038 97.028,50.292 21.844,51.816 4.826,52.07 28.194,52.07 31.75,52.07 50.546,52.07 53.34,52.07 93.726,52.07 38.608,52.324 59.69,52.324 1.016,52.578 89.154,52.578 42.418,52.832 18.034,53.086 73.406,53.086 79.502,53.086 63.5,53.594 67.564,53.594 14.732,53.848 25.146,53.848 12.192,54.102 30.226,54.102 35.306,54.102 46.228,54.102 56.388,54.102 3.302,54.356 90.678,54.864 93.218,54.864 96.774,54.864 51.562,55.372 34.798,56.134 57.15,56.134 61.976,56.134 79.248,56.134 54.61,56.642 84.074,56.896 90.678,56.896 67.31,57.15 73.406,57.15 43.942,57.404 15.24,57.912 17.78,57.912 21.59,57.912 39.116,57.912 10.16,58.166 32.512,58.42 36.576,58.42 71.374,58.42 75.692,58.42 41.91,58.674 52.832,58.674 57.15,58.674 63.5,58.674 60.706,58.928 91.948,58.928 5.08,59.182 81.28,59.182 87.122,59.182 0.508,59.436
L2W_CLK: J2.4 U4.7 | length 42.7
  Top Layer w0.254: v1(18.288,38.608) v1(18.288,40.64) ; U4.7 20.533,28.235 20.828,27.94 22.606,27.94 22.86,27.686 v1(22.86,25.908)
  Bottom Layer w0.254: J2.4 17.78,41.91 18.288,41.402 v1(18.288,40.64) ; v1(18.288,38.608) 18.288,26.416 19.304,25.4 22.352,25.4 v1(22.86,25.908)
L2W_DATA: J2.3 U4.8 | length 41.6
  Top Layer w0.254: U4.8 20.421,27.585 20.828,27.178 21.844,27.178 22.098,26.924 v1(22.098,26.416) ; v1(19.304,38.608) v1(19.304,40.64)
  Bottom Layer w0.254: J2.3 18.034,44.45 19.304,43.18 v1(19.304,40.64) ; v1(19.304,38.608) 19.304,37.592 18.796,37.084 18.796,27.178 19.558,26.416 v1(22.098,26.416)
NetBUZ1_2: BUZ1.2 Q1.3 | length 2.6
  Bottom Layer w0.61: BUZ1.2 Q1.3
NetC5_2: C5.2 U1.3 | length 2.4
  Top Layer w0.61: C5.2 57.174,27.789 59.481,27.789 U1.3
NetC10_2: C10.2 U2.4 | length 1.6
  Top Layer w0.508: U2.4 46.411,30.193 46.411,31.716 C10.2
NetC20_1: C20.1 FB2.2 U3.3 | length 33.7
  Bottom Layer w0.254: FB2.2 38.354,57.404 39.37,56.388 39.37,45.466 37.592,43.688 30.48,43.688 30.309,43.859 C20.1 C20.1@30.304,44.455 ; U3.3 29.972,45.212 30.226,44.958 30.226,44.466 C20.1@30.242,44.45
NetC20_2: C20.2 FB3.2 U3.2 | length 11.8
  Bottom Layer w0.254: U3.2 30.48,46.16 30.48,45.466 30.734,45.212 30.988,45.212 31.159,45.041 C20.2 36.83,44.45 37.592,45.212 FB3.2
NetC21_1: C21.1 FB4.2 U5.3 | length 33.5
  Bottom Layer w0.254: FB4.2 59.69,57.404 60.706,56.388 60.706,45.72 58.674,43.688 52.07,43.688 51.816,43.942 C21.1 51.816,44.958 51.546,45.228 U5.3
NetC21_2: C21.2 FB5.2 U5.2 | length 11.2
  Bottom Layer w0.254: U5.2 52.046,45.49 52.578,44.958 52.578,44.538 C21.2 57.658,44.45 58.928,45.72 FB5.2
NetD2_K: D2.K L1.1 U1.2 | length 21
  Top Layer w1.016: D2.K L1.1 58.674,22.352 61.722,25.4 61.722,27.94 61.15,28.512 61.15,28.517 60.555,29.113 59.535,29.113 U1.2
NetD3_A: D3.A J5.3 K1.2 Q2.4 Q3.5 Q4.3 TP6.1 | length 112
  Top Layer w0.254: J5.3 76.708,57.15 77.724,58.166 90.678,58.166 91.694,57.15 TP6.1
  Top Layer w1.016: D3.A J5.3 ; Q4.3 84.712,34.36 v1(84.732,34.34)
  Bottom Layer w1.016: Q3.5 75.438,44.654 76.708,45.924 D3.A 81.026,45.974 Q2.4 82.804,44.196 86.36,44.196 87.63,42.926 87.63,35.306 86.664,34.34 v1(84.732,34.34) 81.33,34.34 79.502,32.512 79.502,11.176 80.772,9.906 94.234,9.906 95.25,10.922 K1.2
NetD3_K: D3.K J5.2 K1.5 R14.1 R15.1 | length 54.5
  Top Layer w1.016: R14.1 R15.1 78.448,40.932 ; J5.2 81.788,47.752 ; K1.5 83.079,15.411 80.601,15.411 79.502,16.51 79.502,39.878 78.448,40.932 ; D3.K 87.12,45.976 87.12,47.157 86.525,47.752 81.788,47.752 ; 78.448,40.932 78.778,40.932 79.502,41.656 79.502,45.466 81.788,47.752
NetFB2_1: FB2.1 J3.3 J3.4 | length 7.5
  Bottom Layer w0.254: J3.4 J3.3 27.432,57.288 FB2.1
NetFB3_1: FB3.1 J3.1 J3.2 | length 10.2
  Bottom Layer w0.254: J3.2 J3.1 FB3.1
NetFB4_1: FB4.1 J4.3 J4.4 | length 7.5
  Bottom Layer w0.254: J4.4 J4.3 48.768,57.266 FB4.1
NetFB5_1: FB5.1 J4.1 J4.2 | length 10.2
  Bottom Layer w0.254: J4.2 J4.1 FB5.1
NetJ5_1: J5.1 R21.2 | length 67.6
  Top Layer w0.254: R21.2 33.528,38.896 v1(33.547,38.915)
  Bottom Layer w0.254: v1(33.547,38.915) 33.542,38.92 33.542,39.13 34.798,40.386 51.562,40.386 53.086,41.91 66.548,41.91 68.58,43.942 68.58,47.498 72.39,51.308 78.232,51.308 78.486,51.054 85.598,51.054 86.868,52.324 J5.1
NetJ7_1: J7.1 K1.4 | length 16.3
  Top Layer w2.032: K1.4 83.292,27.482 87.172,27.482 89.916,30.226 89.916,34.798 91.44,36.322 J7.1
NetJ7_2: J7.2 K1.3 | length 17.1
  Top Layer w2.032: J7.2 95.33,41.402 96.52,40.212 96.52,33.274 95.25,32.004 K1.3
NetJ7_3: J7.3 K1.1 | length 37.6
  Bottom Layer w2.032: K1.1 89.25,26.258 96.52,33.528 96.52,43.18 J7.3
NetJ8_1: J8.1 R25.2 | length 10.2
  Top Layer w0.254: v3(6.604,37.592) 7.366,37.592 8.09,36.868 R25.2
  Bottom Layer w0.254: J8.1 v3(6.604,37.592)
NetJ8_2: J8.2 R23.1 R24.1 | length 8.1
  Bottom Layer w1.016: J8.2 R23.1 R24.1
NetJ8_6: J8.6 R26.2 | length 26.4
  Top Layer w0.254: v3(5.588,20.574) 5.588,30.48 6.604,31.496 8.128,31.496 8.89,32.258 8.89,33.782 9.398,34.29 R26.2
  Bottom Layer w0.254: J8.6 1.778,21.336 2.54,20.574 v3(5.588,20.574)
NetJ9_7: J9.7 U4.14 | length 27.9
  Top Layer w0.254: U4.14 32.979,28.235 35.56,25.654 35.56,18.796 36.576,17.78 v1(36.576,16.002)
  Bottom Layer w0.254: v1(36.576,16.002) 36.576,15.748 36.615,15.709 J9.7
NetQ1_1: Q1.1 R9.2 R10.2 | length 4
  Bottom Layer w0.254: R9.2 16.44,17.204 Q1.1 18.238,15.174 R10.2
NetQ2_1: Q2.1 Q3.4 Q4.1 R19.2 R20.2 TP7.1 | length 48
  Top Layer w0.254: Q4.1 85.16,36.76 85.366,36.554 85.366,36.344 v1(85.344,36.322) 87.63,36.322 88.392,37.084 88.392,48.514 89.154,49.276 94.234,49.276 95.393,50.435 95.393,51.705 TP7.1
  Bottom Layer w0.254: R19.2 72.02,33.412 R20.2 73.914,34.798 ; Q3.4 73.533,35.179 73.914,34.798 ; v1(85.344,36.322) 84.582,36.322 84.328,36.576 84.328,38.754 83.204,38.754 82.296,37.846 82.296,36.322 81.788,35.814 79.502,35.814 78.486,34.798 73.914,34.798
NetR1_2: R1.2 R2.2 R3.2 R4.2 U1.1 U1.7 U1.8 | length 19.5
  Top Layer w1.016: U1.1 U1.8 ; U1.7 U1.8 ; R2.2@70.719,30.099 R2.2@70.786,30.166 ; R4.2 R3.2 R2.2@70.786,30.166 ; R1.2 R2.2@70.786,30.286 ; U1.8 70.719,30.353 R2.2@70.786,30.286 ; R2.2@70.786,30.166 R2.2 R2.2@70.786,30.286
NetR5_2: R5.2 R6.2 U1.5 | length 5.7
  Top Layer w0.508: R6.2 R5.2 ; R5.2@64.989,23.229 U1.5@64.989,26.508
  Top Layer w0.61: U1.5 U1.5@64.989,26.508 ; R5.2@64.989,23.229 R5.2
OW: J10.2 R12.2 U3.5 U4.17 U5.5 | length 101.7
  Top Layer w0.254: R12.2 v1(26.162,46.228) 26.67,45.72 26.67,41.148 27.178,40.64 29.972,40.64 31.496,39.116 31.496,31.496 30.185,30.185 U4.17
  Bottom Layer w0.254: U3.5 15.046,46.168 13.716,47.498 J10.2 13.716,57.912 14.986,59.182 39.37,59.182 40.894,57.658 40.894,47.498 42.224,46.168 U5.5
PWM_FAN: R19.1 TP8.1 U4.15 | length 54.3
  Top Layer w0.254: U4.15 34.981,28.885 36.322,30.226 36.322,35.56 v1(37.084,36.322) ; v1(39.116,36.322) 56.642,36.322 59.69,33.274 v1(61.214,33.274) TP8.1
  Bottom Layer w0.254: v1(37.084,36.322) v1(39.116,36.322) ; v1(61.214,33.274) R19.1
RCC_OSC32_IN: C11.2 R26.1 U4.2 XTAL1.2 | length 7.9
  Top Layer w0.254: R26.1 13.638,34.152 C11.2 15.469,34.127 XTAL1.2 16.957,32.679 17.272,32.363 17.272,32.004 17.791,31.485 U4.2
RCC_OSC32_OUT: C12.2 R25.1 U4.3 XTAL1.1 | length 11.2
  Top Layer w0.254: R25.1 13.208,33.274 13.611,32.871 13.611,31.687 13.6,31.677 13.998,31.279 XTAL1.1 17.235,31.279 17.679,30.835 U4.3
RESET: C15.2 J6.10 R13.2 U4.6 | length 20.9
  Top Layer w0.254: U4.6 22.027,28.885 v1(22.098,28.956) 22.164,29.022 22.708,29.022 23.02,29.334 23.02,31.91 23.876,32.766 25.146,32.766 25.654,33.274 25.654,34.544 26.162,35.052 28.956,35.052 29.464,35.56 29.464,37.338 29.083,37.719 J6.10
  Bottom Layer w0.254: C15.2 21.12,28.956 v1(22.098,28.956) 23.33,28.956 R13.2
SYS_SWCLK: J6.4 R11.1 U4.19 | length 20.5
  Top Layer w0.254: J6.4 24.384,38.862 25.146,39.624 29.464,39.624 30.48,38.608 30.48,32.004 29.972,31.496 28.056,31.496 R11.1 27.305,31.485 U4.19
SYS_SWDIO: J6.2 U4.18 | length 23.5
  Top Layer w0.254: J6.2 23.114,38.862 24.384,40.132 29.718,40.132 30.988,38.862 30.988,31.75 30.073,30.835 U4.18
UART2_RX: J8.4 U4.10 | length 25.4
  Top Layer w0.254: v1(16.51,23.114) 17.272,23.876 17.272,25.908 17.649,26.285 U4.10
  Bottom Layer w0.254: J8.4 2.032,29.718 6.35,29.718 7.366,28.702 7.366,24.13 8.382,23.114 v1(16.51,23.114)
UART2_TX: J8.5 U4.9 | length 29.4
  Top Layer w0.254: v1(15.494,23.876) 16.256,23.876 16.764,24.384 16.764,26.162 17.537,26.935 U4.9
  Bottom Layer w0.254: J8.5 4.064,27.432 5.334,26.162 5.334,22.86 6.35,21.844 17.018,21.844 17.526,22.352 17.526,23.368 17.018,23.876 v1(15.494,23.876)
VMON: R7.1 R8.2 U4.1 | length 3.3
  Top Layer w0.254: U4.1 R7.1@19.123,33.925 ; R7.1 R8.2
pads on no net: ENC1. J6.6 J6.7 J6.8 J10. U3.10 U5.10
copper on no net:
  other v2: 2.5,2.5 95.5,2.5 2.5,57.5 95.5,57.5

## Polygon pours and split planes (outlines as drawn)
GND on Bottom Layer "12V_IN" (solid, remove dead copper, pour order 1): 0,60 98,60 97.79,59.79 97.79,49.53 87.63,49.53 87.63,33.02 80.01,33.02 80.01,10.16 97.79,10.16 97.79,15.24 124.74,15.24 124.87,15.37 125,15.24 125,0 0,0
12V on Bottom Layer "12V_IN" (solid, remove dead copper, pour order 13): 2386.813,33.782
12V on Bottom Layer "12V_IN" (solid, remove dead copper, pour order 2): 2386.813,33.782
no net on Top Layer "12V_IN" (solid, pour order 14): 105.41,11.43
GND on Top Layer "12V_IN" (solid, remove dead copper, pour order 11): 0,60 98,60 98,49.74 97.79,49.53 87.63,49.53 87.63,33.02 80.01,33.02 80.01,10.16 97.79,10.16 97.79,15.24 124.74,15.24 125,15.5 125,0 0,0
GND on Top Layer "12V_IN" (solid, pour order 12): 102.87,26.67

## Keep-outs
Keep-Out Layer:
  lines w0.127: 0,0 0,60 98,60 98,15.5 125,15.5 125,0 98,0 0,0

## Silkscreen, mask and mechanical layers (free items; w line width, h text height)
Top Overlay:
  text "1WIRE" at 6.096,59.69 h3 r270
  text "DRAIN" at 90.524,53.186 h1
  text "GATE" at 94.588,53.195 h1
  text "GND  DATA  VCC" at 8.636,51.054 h1
  text "L2WIRE" at 4.572,50.038 h3 r270
  text "TEMP1" at 20.112,48 h3
  text "TEMP2" at 41.448,48 h3
  text "POWER" at 64.116,47.7 h3
  text "FAN" at 79.502,47.7 h3
  text "GND" at 9.04,46.9 h1.5
  text "RELAY" at 86.106,44.879 h3 r270
  text "FAN/RELAY / R14=12V / R15=5V" at 78.994,40.894 h1.5
  text "DEBUG" at 23.314,39.589 h2
  text "BLUETOOTH" at 3.63,37.292 h3 r270
  text "PWM" at 60.552,36.422 h1
  text "+3V3" at 38.024,23.878 h1.5
  text "+12V" at 22.756,15.39 h1.5
  text "+5V" at 56.538,6.512 h1.5
  text "GND" at 66.698,4.228 h1.5
  text "SB.ATVIE.1221" at 77.802,0.473 h2
Bottom Overlay:
  text "T+" at 26.37,51.3 h3
  text "T-" at 36.276,51.3 h3
  text "T+" at 47.706,51.3 h3
  text "T-" at 57.612,51.3 h3
  text "GND" at 66.602,51.219 h2
  text "+12V" at 72.19,51.2 h2
  text "GND" at 78.032,51.219 h2
  text "VCC" at 83.112,51.215 h2
  text "FB" at 87.684,51.2 h2
  text "VCC" at 5.804,48.768 h1
  text "GND" at 5.842,46.228 h1
  text "DATA" at 5.791,43.688 h1
  text "CLK" at 5.808,41.148 h1
  text "BLUETOOTH / R23=5V / R24=3V3" at 13.462,38.354 h1.5
  text "S-CONTROLLER" at 60.151,37.755 h5
  text "EN" at 6.245,36.83 h1
  text "VCC" at 6.245,34.29 h1
  text "GND" at 6.245,31.75 h1
  text "TX" at 6.245,29.21 h1
  text "RX" at 6.245,26.67 h1
  text "STATE" at 6.245,24.13 h1
  text "TLC59282" at 39.578,13.79 h3
  text "PCB REV B" at 87.956,0.469 h2
  text "PINOUT: / 1. VCC / 2. VCC / 3. FORCE OFF / 4. GND / 5. LATCH / 6. GND / 7. SPI_MOSI / 8. GND / 9. SPI_CLK / 10.GND" at 23.114,0.254 h1.5